# Altium PCB Beambreak Array L - Emmiter.PcbDoc
Units mm, origin at the board's own origin, x right, y up, seen from the top; angles counter-clockwise.
Board outline 12 x 106 mm, 2 copper layers (Top Layer, Bottom Layer), stack 1.57 mm thick; 12 components, 11 nets, 28 pads, 1 vias.
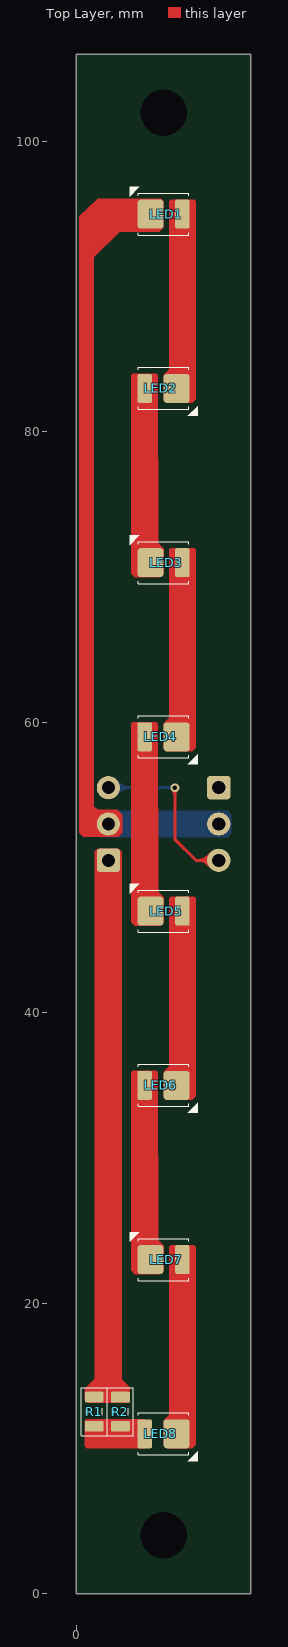
[diagram p0: Top Layer view]
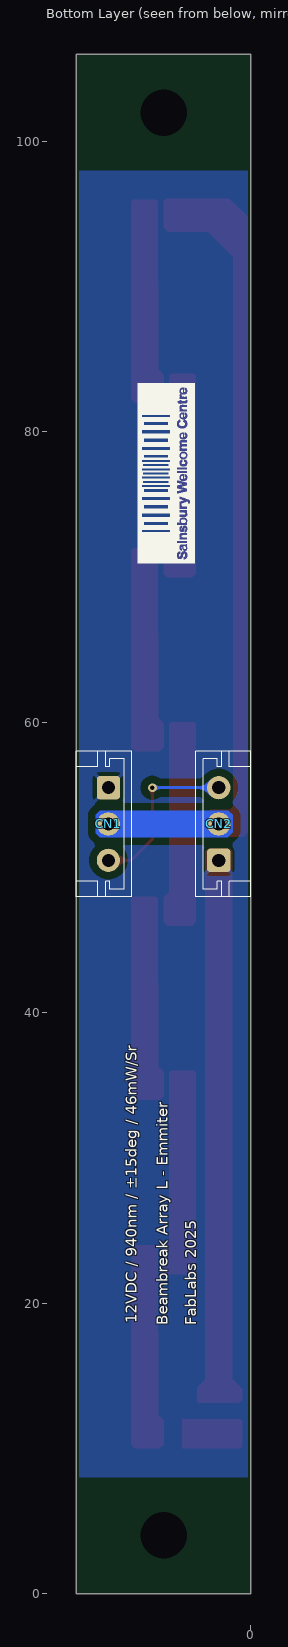
[diagram p1: Bottom Layer view, seen from below]
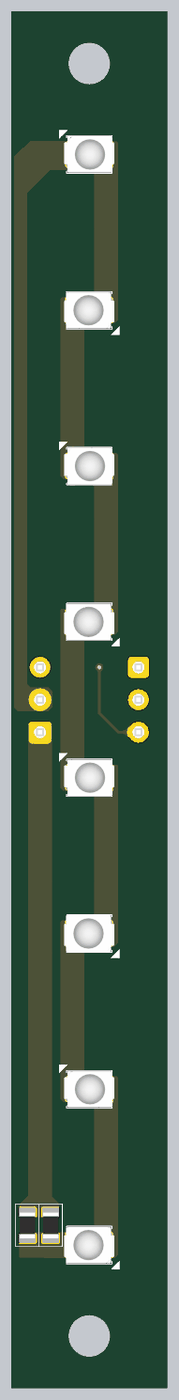
[diagram p2: 3D render of the assembled board from above, using the file's embedded part models]

## Layer stack, top to bottom
Top Solder: solder mask 0.0127, Solder Resist, Dk 3.8
Top Layer: signal copper 0.035
Dielectric: core 1.5, FR-4, Dk 4.5
Bottom Layer: signal copper 0.035
Bottom Solder: solder mask 0.0127, Solder Resist, Dk 3.8

## Board outline
0,0 0,106 12,106 12,0

## Design rules (kind name [scope] priority, off if disabled: settings)
BoardOutlineClearance [(OnLayer('Bottom Overlay') OR OnLayer('Top Overlay'))] p1: gap=0 ignorepadtopadclearanceinfootprint=FALSE
BoardOutlineClearance BoardOutlineClearance_1 [All] p2: gap=0.2 ignorepadtopadclearanceinfootprint=FALSE
Clearance [InPolygon] p1: gap=0.508 ignorepadtopadclearanceinfootprint=FALSE
Clearance Clearance_1 [All] p2: gap=0.089 ignorepadtopadclearanceinfootprint=FALSE except(0.127: Arc-Via Track-Via SMDPad-Via THPad-Via Via-Via Via-Fill Via-Poly Via-Region Via-Text; 0.203: Arc-Hole Track-Hole Via-Hole Fill-Hole Poly-Hole Region-Hole Text-Hole)
ComponentClearance [All] p1: gap=0.089 collisioncheckmode=3 verticalgap=0.089 showdistances=TRUE
DiffPairsRouting JLCPCB_6L_90Ohm [InDifferentialPairClass('USB')] p1: maxlimit=0.127 minlimit=0.127 mostfreqgap=0.127 toplayer_minwidth=0.172 toplayer_maxwidth=0.172 toplayer_prefwidth=0.172 bottomlayer_minwidth=0.172 bottomlayer_maxwidth=0.172 bottomlayer_prefwidth=0.172 maxuncoupledlength=12.7
DiffPairsRouting JLCPCB_6L_120Ohm [InDifferentialPairClass('RS485')] p2: maxlimit=0.305 minlimit=0.127 mostfreqgap=0.305 toplayer_minwidth=0.16 toplayer_maxwidth=0.16 toplayer_prefwidth=0.16 bottomlayer_minwidth=0.16 bottomlayer_maxwidth=0.16 bottomlayer_prefwidth=0.16 maxuncoupledlength=12.7
Height [All] p1: minheight=0 maxheight=1816.048 prefheight=12.7
HoleSize [All] p1: absolutevalues=TRUE maxlimit=6.3 minlimit=0.2 maxpercent=80.000 minpercent=20.000
HoleToHoleClearance [All] p1: gap=0.25 allowstackedmicrovias=FALSE
MinimumAnnularRing [All] p1: minimumring=0.076
MinimumSolderMaskSliver [All] p1: minsoldermaskwidth=0
PlaneClearance [All] p1: clearance=0.089
PlaneConnect PlaneConnectPowerPads [InPadClass('PowerPads')] p1: planeconnectstyle=Direct reliefexpansion=0.508 reliefentries=4 reliefconductorwidth=0.254 reliefairgap=0.254
PlaneConnect [All] p2: pad.planeconnectstyle=Relief pad.reliefexpansion=0.3 pad.reliefentries=4 pad.reliefconductorwidth=0.089 pad.reliefairgap=0.089 via.planeconnectstyle=Direct via.reliefexpansion=0.3 via.reliefentries=4 via.reliefconductorwidth=0.127 via.reliefairgap=0.127
PolygonConnect PolygonConnectPowerPads [(InNet('GND') OR InNet('3V3') OR InNet('3V3A'))] p1: thpad.connectstyle=Relief thpad.reliefconductorwidth=0.254 thpad.reliefentries=4 thpad.polygonreliefangle="45 Angle" thpad.airgapwidth=0.254 smdpad.connectstyle=Relief smdpad.reliefconductorwidth=0.254 smdpad.reliefentries=4 smdpad.polygonreliefangle="45 Angle" smdpad.airgapwidth=0.254 via.connectstyle=Direct via.reliefconductorwidth=0.254 via.reliefentries=4 via.polygonreliefangle="45 Angle" via.airgapwidth=0.254
PolygonConnect [All] p2: connectstyle=Direct reliefconductorwidth=0.089 reliefentries=4 polygonreliefangle="90 Angle" airgapwidth=0.089
RoutingVias [All] p1: holewidth=0.2 width=0.45 viastyle="Through Hole" minholewidth=0.2 minwidth=0.45 maxholewidth=6.3 maxwidth=6.55
SilkToSilkClearance [All] p1: silktosilkclearance=0
SilkToSolderMaskClearance [IsPad] p1 off: minsilkscreentomaskgap=0.089 clearancetoexposedcopper=TRUE
SolderMaskExpansion [All] p1: expansion=0.075 istentingtop=FALSE
SupplyNets "Schematic Supply Nets" [InNet('12V')] p1: voltage=0.000
SupplyNets "Schematic Supply Nets_4" [InNet('GND')] p2: voltage=0.000
Width [All] p1: maxlimit=1816.048 minlimit=0.089 preferedwidth=0.089
20 further rules are at their usual default settings.

## Components (designator, comment, footprint, x,y, rotation, side; value= is the part's Value field where it differs from the comment)
CN1 "POWER IN" EH_1X3P 9.8,53 r270 bottom
CN2 "POWER THRU" EH_1X3P 2.2,53 r90 bottom
LED1 "LED2835_IR_940nm" "LED_CHIP_3528 - lens - S" 6,95 r180 top
LED2 "LED2835_IR_940nm" "LED_CHIP_3528 - lens - S" 6,83 r0 top
LED3 "LED2835_IR_940nm" "LED_CHIP_3528 - lens - S" 6,71 r180 top
LED4 "LED2835_IR_940nm" "LED_CHIP_3528 - lens - S" 6,59 r0 top
LED5 "LED2835_IR_940nm" "LED_CHIP_3528 - lens - S" 6,47 r180 top
LED6 "LED2835_IR_940nm" "LED_CHIP_3528 - lens - S" 6,35 r0 top
LED7 "LED2835_IR_940nm" "LED_CHIP_3528 - lens - S" 6,23 r180 top
LED8 "LED2835_IR_940nm" "LED_CHIP_3528 - lens - S" 6,11 r0 top
R1 "R0805-27R" RES_CHIP_0805 1.225,12.525 r270 top value=27
R2 "R0805-27R" RES_CHIP_0805 3.025,12.525 r270 top value=27

## Footprints (in the part's own frame and the unit in brackets; to place one, negate y for a bottom-side part, rotate by r counter-clockwise, add the part's x,y. Pads: shape width x height; smd on the part's side, far side on the other; paste and mask are expansions set on the pad)
EH_1X3P [mm]
  rrect25% 1.6x1.6 hole 0.9: 1(-2.5,0)
  round 1.6 hole 0.9: 2(0,0) 3(2.5,0)
  silkscreen extent -5,-2.2 5,1.6, body extent -5,-2.2 5,1.6, height 6
"LED_CHIP_3528 - lens - S" [mm] "Molded Diode, 2-Leads, Body 3.30x2.80mm, IPC Medium Density"
  rrect25% 1x2 smd: 1(-1.3,0)
  rrect25% 1.8x2 smd: 2(0.9,0)
  silkscreen extent -1.75,-1.89 2.34,1.45, body extent -1.95,-1.4 1.95,1.4, height 2.86
RES_CHIP_0805 [mm]
  rrect25% 0.75x1.3 smd: 1(-1,0) 2(1,0)
  silkscreen extent -1.65,-0.9 1.65,0.9, body extent -1,-0.6 1,0.6, height 0.45

## Part data
CN1 CN2: library part CMP-370-0056-2, "Connector Header, EH Series, 3 Position, 2.5mm, Through Hole, Press-Fit, Solder, Natural", Current Rating=3A, LCSC Part N.=C160259, PartNumber=B3B-EH-A(LF)(SN), Contact Material=Brass, Contact Plating=Tin, Gender=Male, Mount="through hole", Number of Contacts=3, Number of Positions=3, Number of Rows=1, Orientation=Straight, Pitch=2.5mm
LED1 LED2 LED3 LED4 LED5 LED6 LED7 LED8: library part CMP-520-0034-2, "240mW/sr 5V 100mA 1.4V~2.1V 925nm~955nm SMD2835-2P LED", Colour=IR, Forward Current=100mA, Forward Voltage=1.4V, LCSC Part N.=C7500105, PartNumber=JNJ-LTJV0106W15/14mil/940, Mount="Surface Mount", Pick&PlaceFootprint=2835, Wavelength=940nm
R1 R2: library part CMP-633-0197-1, "125mW Thick Film Resistors 150V ±100ppm/℃ ±1% 0805 Chip Resistor", Case/Package=0805, LCSC Part N.=C17594, Number of Resistors=1, PartNumber=0805W8F270JT5E, Power Rating=125mW, Tolerance=1%, Voltage Rating=150V, Mount=SMD, Pick&PlaceFootprint=R0805

## Free pads (board coordinates)
  round 0 hole 3.2 unplated: 1(6,102) 1(6,4)

## Via types
v1: diameter 0.61, hole 0.305, Top Layer to Bottom Layer, tented both sides, 1 vias

## Nets (pads, with @x,y where several pads share a name; then routed paths per layer and width w, separated by ;. In a path a pad name is that pad's centre, name@x,y a point inside that pad or via, vN(x,y) a via of type N, cw(c..) or ccw(c..) an arc to the next point about the centre after c; other vN are vias at no path point)
12V: CN1.2 CN2.2 LED1.2
DATA_THRU: CN1.3 CN2.3 | length 11.8
  Top Layer w0.203: v1@6.775,55.55 6.775,51.95 8.225,50.5 CN1.3
  Bottom Layer w0.203: CN2.3 CN2.3@2.225,55.525 ; CN2.3@2.225,55.5 v1@6.75,55.5 ; v1@6.75,55.525 v1@6.775,55.55
  other v1: 6.775,55.5
GND: CN1.1 CN2.1 R1.1 R2.1
NetLED1_1: LED1.1 LED2.2
NetLED2_1: LED2.1 LED3.2
NetLED3_1: LED3.1 LED4.2
NetLED4_1: LED4.1 LED5.2
NetLED5_1: LED5.1 LED6.2
NetLED6_1: LED6.1 LED7.2
NetLED7_1: LED7.1 LED8.2
NetLED8_1: LED8.1 R1.2 R2.2

## Polygon pours and split planes (outlines as drawn)
GND on Bottom Layer "GND_L02_P000" (solid, remove dead copper, pour order 0): 0,8 12,8 12,98 0,98

## Other copper
Top Layer:
  region net GND: 0.775,13.15 3.6,13.15 3.675,13.225 3.675,14.201 3.124,14.743 3.124,47.288 3.124,51.1 2.925,51.3 1.45,51.3 1.276,51.126 1.276,14.801 0.575,14.1 0.575,13.35
  region net NetLED8_1: 0.699,10.017 4.7,10.01 4.7,11.99 0.675,11.99 0.575,11.89 0.575,10.141
  region net NetLED4_1: 5.75,46 4.025,46 3.775,46.25 3.775,47.975 3.775,59.9 3.875,60 5.5,60 5.602,59.898 5.622,48.328 6,47.95 6,46.25
  region net NetLED6_1: 5.75,22 4.025,22 3.775,22.25 3.775,23.975 3.775,35.9 3.875,36 5.5,36 5.602,35.898 5.622,24.328 6,23.95 6,22.25
  region net NetLED7_1: 6.25,10 7.975,10 8.225,10.25 8.225,11.975 8.225,23.9 8.125,24 6.5,24 6.398,23.898 6.378,12.328 6,11.95 6,10.25
  region net NetLED5_1: 6.25,34 7.975,34 8.225,34.25 8.225,35.975 8.225,47.9 8.125,48 6.5,48 6.398,47.898 6.378,36.328 6,35.95 6,34.25
  region net NetLED3_1: 6.25,58 7.975,58 8.225,58.25 8.225,59.975 8.225,71.9 8.125,72 6.5,72 6.398,71.898 6.378,60.328 6,59.95 6,58.25
  region net NetLED2_1: 5.75,70 4.025,70 3.775,70.25 3.775,71.975 3.775,83.9 3.875,84 5.5,84 5.602,83.898 5.622,72.328 6,71.95 6,70.25
  region net NetLED1_1: 6.25,82 7.975,82 8.225,82.25 8.225,83.975 8.225,95.9 8.125,96 6.5,96 6.398,95.898 6.378,84.328 6,83.95 6,82.25
  region net 12V: 2.974,93.806 5.698,93.798 5.975,94.074 5.975,95.925 5.85,96.05 1.464,96.05 0.2,94.861 0.2,56.925 0.2,52.4 0.475,52.125 2.875,52.125 3.15,52.4 3.15,53.625 2.8,53.975 1.45,53.975 1.2,54.225 1.2,92.037
Bottom Layer:
  region net 12V: 1.529,53.905 10.405,53.92 10.675,53.65 10.675,52.35 10.402,52.077 1.598,52.077 1.25,52.425 1.25,53.625

## Silkscreen, mask and mechanical layers (free items; w line width, h text height)
Bottom Overlay:
  drawing of 8 lines, arcs and shapes, not listed
  text "12VDC / 940nm / ±15deg / 46mW/Sr" at 7.588,18.598 h1.27 r270
  text "FabLabs 2025" at 3.49,18.473 h1.27 r270
  text "Beambreak Array L - Emmiter" at 5.428,18.473 h1.27 r270
Board Shape:
  the board outline again, w0.05